# Altium PCB PCB_USB_Board.PcbDoc
Units mil, origin at the board's own origin, x right, y up, seen from the top; angles counter-clockwise.
Board outline 451 x 592 mil, 2 copper layers (Top Layer, Bottom Layer), stack 61.811 mil thick; 5 components, 4 nets, 40 pads, 3 vias.
Unrouted connection lines stored in the file: 17.
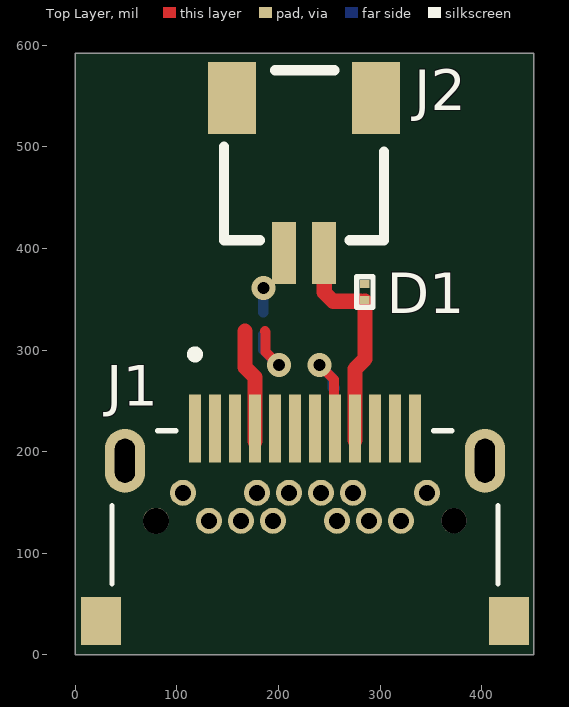
[diagram p0: Top Layer view]
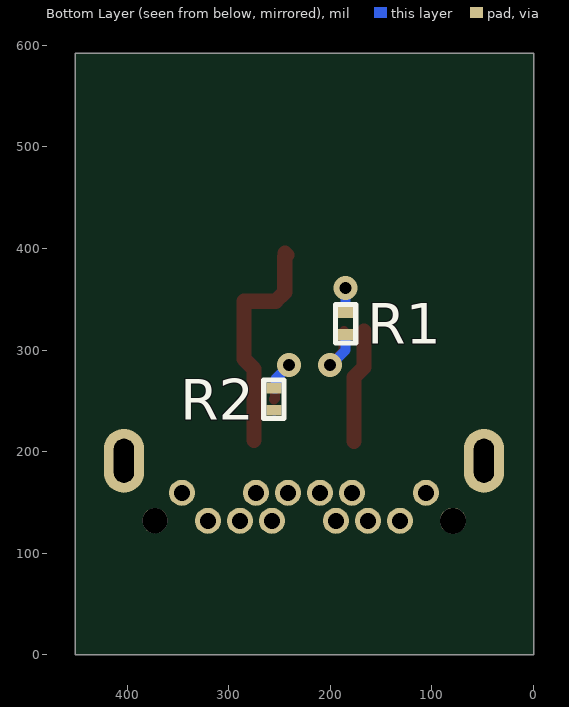
[diagram p1: Bottom Layer view, seen from below]
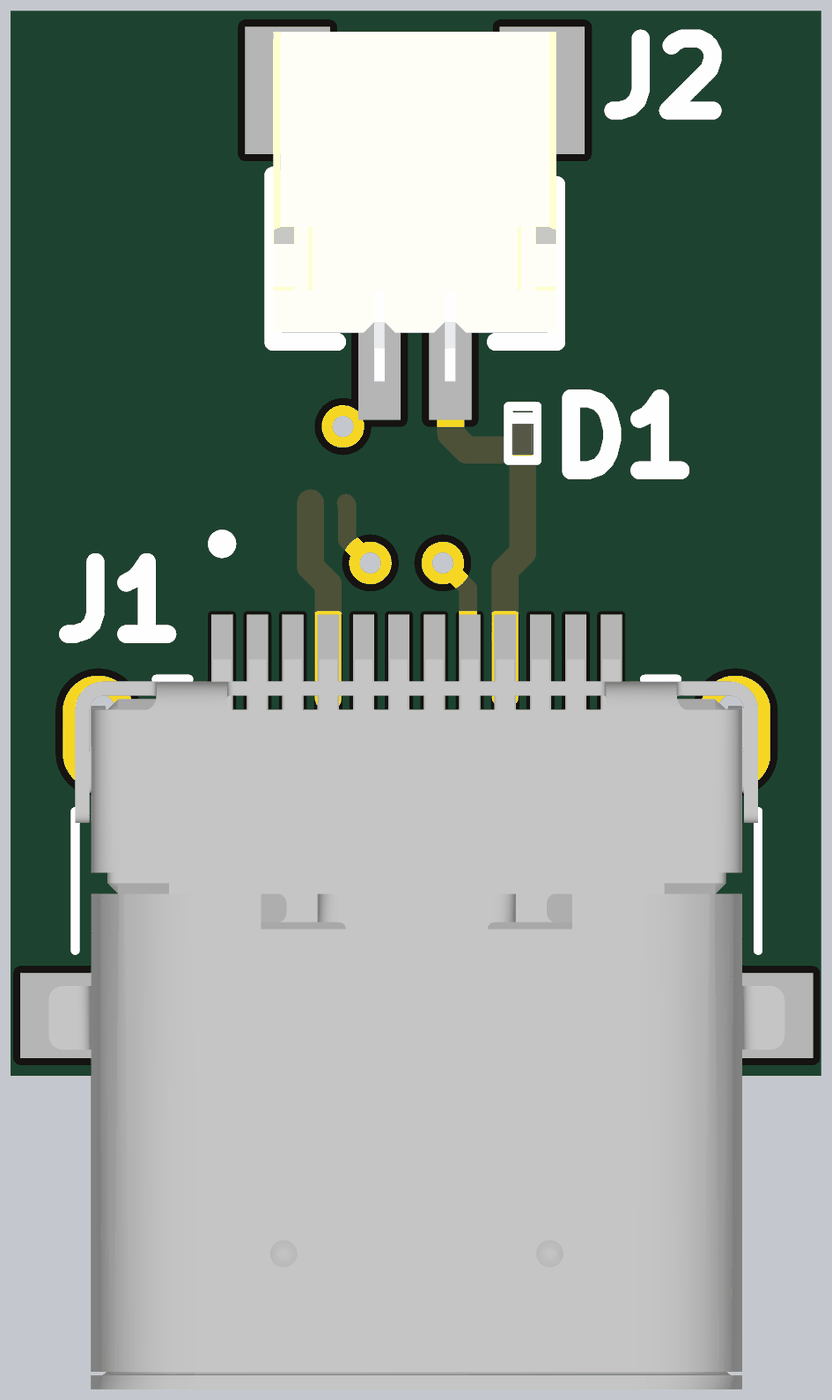
[diagram p2: 3D render of the assembled board from above, using the file's embedded part models]

## Layer stack, top to bottom
Top Solder: solder mask 0.3937, Solder Resist, Dk 3.5
Top Layer: signal copper 1.378
Dielectric 1: core 59.0551, FR-4, Dk 4.8
Bottom Layer: signal copper 1.378
Bottom Solder: solder mask 0.3937, Solder Resist, Dk 3.5

## Board outline
0,0 451,0 451,592 0,592

## Design rules (kind name [scope] priority, off if disabled: settings)
Clearance [All] p1: gap=7 ignorepadtopadclearanceinfootprint=FALSE except(5: Arc-SMDPad Track-SMDPad SMDPad-SMDPad)
HoleSize [All] p1: absolutevalues=TRUE maxlimit=1000 minlimit=1 maxpercent=80.000 minpercent=20.000
HoleToHoleClearance [All] p1: gap=2 allowstackedmicrovias=TRUE
MinimumSolderMaskSliver [All] p1: minsoldermaskwidth=2
PolygonConnect [All] p1: connectstyle=Relief reliefconductorwidth=10 reliefentries=4 polygonreliefangle="90 Angle" airgapwidth=10
RoutingVias [All] p1: holewidth=11.81 width=23.62 viastyle="Through Hole" minholewidth=11.81 minwidth=23.62 maxholewidth=11.81 maxwidth=23.62
SilkToSilkClearance [All] p1: silktosilkclearance=2
SilkToSolderMaskClearance [IsPad] p1: minsilkscreentomaskgap=2 clearancetoexposedcopper=TRUE
SolderMaskExpansion [All] p1: expansion=4 istentingtop=FALSE
Width [All] p1: maxlimit=100 minlimit=10 preferedwidth=12 minimp=50.000000 maximp=50.000000 favimp=50.000000
25 further rules are at their usual default settings.

## Components (designator, comment, footprint, x,y, rotation, side; value= is the part's Value field where it differs from the comment)
D1 "PESD5V0H1BSFYL" DSN0603-2 285,357.13 r270 top
J1 "UJ32-C-H-G-H2-SMT-TR" CUI_UJ32-C-H-G-H2-SMT-TR 226,4 r0 top locked
J2 "SM02B-SRSS-TB(LF)(SN)" SM02B-SRSS-TB(LF)(SN) 225,473 r180 top locked
R1 "5.1K" Res-0201 185,326 r270 bottom value=5.1kR
R2 "5.1K" Res-0201 255.53,251.53 r90 bottom value=5.1kR

## Footprints (in the part's own frame and the unit in brackets; to place one, negate y for a bottom-side part, rotate by r counter-clockwise, add the part's x,y. Pads: shape width x height; smd on the part's side, far side on the other; paste and mask are expansions set on the pad)
CUI_UJ32-C-H-G-H2-SMT-TR [mm]
  rect 0.3x1.7 smd mask+0.05: A1(-2.75,5.56) A2(-2.25,5.56) A3(-1.75,5.56) A4(-1.25,5.56) A5(-0.75,5.56) A6(-0.25,5.56) A7(0.25,5.56) A8(0.75,5.56) A9(1.25,5.56) A10(1.75,5.56) A11(2.25,5.56) A12(2.75,5.56)
  round 0.65 hole 0.4: B1(3.05,3.95) B2(2.4,3.25) B3(1.6,3.25) B4(1.2,3.95) B5(0.8,3.25) B6(0.4,3.95) B7(-0.4,3.95) B8(-0.8,3.25) B9(-1.2,3.95) B10(-1.6,3.25) B11(-2.4,3.25) B12(-3.05,3.95)
  rect 1x1.2 smd: SH1(-5.1,0.75) SH2(5.1,0.75)
  oval 1x1.6 hole 0.5 slot 1.1 at 90 deg: SH3(-4.5,4.75) SH4(4.5,4.75)
  round 0.65 hole 0.65 unplated: ""(-3.725,3.25)
  round 0.63 hole 0.63 unplated: ""(3.725,3.25)
  silkscreen extent -4.82,1.67 4.82,7.51, body extent -5.2,-4.53 5.2,5.78, height 3.52
DSN0603-2 [mm]
  rect 0.2x0.24 smd mask+0.055: 1(-0.2,0) 2(0.2,0)
  silkscreen extent -0.38,-0.2 0.38,0.2, body extent -0.3,-0.15 0.3,0.15, height 0.32
Res-0201 [mm]
  rect 0.27x0.37 smd mask+0.055: 1(-0.275,0) 2(0.275,0)
  silkscreen extent -0.48,-0.25 0.48,0.25, body extent -0.3,-0.15 0.3,0.15, height 0.29
SM02B-SRSS-TB(LF)(SN) [mm]
  rect 0.6x1.55 smd: 1(-0.5,1.975) 2(0.5,1.975)
  rect 1.2x1.8 smd: 3(-1.8,-1.9) 4(1.8,-1.9)
  silkscreen extent -2,-2.6 2,1.65, body extent -2,-2.73 2,2.22, height 2.91

## Part data
D1: "5V Clamp 7A (8/20µs) Ipp Tvs Diode Surface Mount DSN0603-2", Digikey Part Number=1727-2675-6-ND, Manufacturer="Nexperia USA Inc.", Package=0603, ComponentLink1Description="Digikey Link", ComponentLink1URL=https://www.digikey.com/en/products/detail/nexperia-usa-inc/PESD5V0H1BSFYL/5981341?s=N4IgTCBcDaIAoFEDKARArANQAwAkCMAQkgGICaAMiALoC%2BQA, Item Type="TVS Diode", Manufacturer Part Number=PESD5V0H1BSFYL
J1: "Type C, USB 3.2 Gen 2x2, 20 Gbps, 20 Vac, 5 A, Right Angle, Gold Flash, Surface Mount, Black Insulator, USB Receptacle", Package=None, Check_prices=https://www.snapeda.com/parts/UJ32-C-H-G-H2-SMT-TR/CUI+Devices/view-part/?ref=eda, CUI_purchase_URL=https://www.cuidevices.com/product/interconnect/connectors/usb-connectors/uj32-c-h-g-h2-smt-tr?utm_source=snapeda.com&utm_medium=referral&utm_campaign=snapedaBOM, Manfacturer="CUI Devices", Manfacturer Part Number=UJ32-C-H-G-H2-SMT-TR, SnapEDA_Link=https://www.snapeda.com/parts/UJ32-C-H-G-H2-SMT-TR/CUI+Devices/view-part/?ref=snap
J2: "Connector Header Surface Mount, Right Angle 2 position 0.039 _1.00mm_", Digikey Part Number=455-SM02B-SRSS-TBDKR-ND, Manufacturer="JST Sales", Manufacturer Part Number=SM02B-SRSS-TB_LF__SN_, Package=None, Availability=Unavailable, ComponentLink1Description="Digikey Link", ComponentLink1URL=https://www.digikey.com/en/products/detail/jst-sales-america-inc/SM02B-SRSS-TB/926708?s=N4IgTCBcDaIMoFkAMYBCBaOAlOd0BVUQBdAXyA, Price=None, SnapEDA_Link=https://www.snapeda.com/parts/SM02B-SRSS-TB%28LF%29%28SN%29/JST%20Sales%20America%20Inc./view-part/447499/?ref=snap
R1 R2: library part RC0201FR-075K1L, "RES 5.1K OHM 1% 1/20W 0201", Case Code (Imperial)=0201, Case Code (Metric)=0603, Digikey Part Number=YAG2741DKR-ND, LCSC Part Number=C274341, Manufacturer=Yageo, Max Operating Temperature=125°C, Max Power Dissipation=50mW, Min Operating Temperature=-55°C, Supplier Part Number=9072847, Temperature Coefficient=200ppm/°C, Tolerance=1%, Voltage Rating=25V, Case/Package=0201, Category="Chip SMD Resistors", ComponentLink1Description=http://www.mouser.com/ds/2/447/RC0201-559633.pdf?src-supplier=Mouser, ComponentLink1URL=http://www.mouser.com/ds/2/447/RC0201-559633.pdf?src-supplier=Mouser, ComponentLink2Description=https://datasheet.octopart.com/RC0201FR-075K1L-Yageo-datasheet-164759695.pdf?src-supplier=Future+Electronics, ComponentLink2URL=https://datasheet.octopart.com/RC0201FR-075K1L-Yageo-datasheet-164759695.pdf?src-supplier=Future+Electronics, ComponentLink3Description=http://www.yageo.com/documents/recent/PYu-RC_Group_51_RoHS_L_10.pdf?src-supplier=Digi-Key, ComponentLink3URL=http://www.yageo.com/documents/recent/PYu-RC_Group_51_RoHS_L_10.pdf?src-supplier=Digi-Key, Features="Moisture Resistant", Height=0.23mm, Item Type=Resistor, Lead Free="Lead Free", Length=0.6mm, Manufacturer Part Number=RC0201FR-075K1L, Number of Terminations=2, Packaging="Tape and Reel", Power Rating=50mW, Pricing="10000=0.0014, 40000=0.0013, 200000=0.0013, 400000=0.0012, 1250000=0.0011 (USD)", RoHS=Yes, RoHS Compliant=Yes, Series=RC, Stock=280000, Supplier="Future Electronics", Termination=SMD/SMT, Width=0.3mm

## Via types
v1: diameter 23.62, hole 11.81, Top Layer to Bottom Layer, 3 vias

## Nets (pads, with @x,y where several pads share a name; then routed paths per layer and width w, separated by ;. In a path a pad name is that pad's centre, name@x,y a point inside that pad or via, vN(x,y) a via of type N, cw(c..) or ccw(c..) an arc to the next point about the centre after c; other vN are vias at no path point)
GND: D1.1 J1.A1 J1.A12 J1.B1 J1.B12 J1.SH1 J1.SH2 J1.SH3 J1.SH4 J2.2 J2.3 J2.4 R1.1 R2.1 | length 24.6
  Bottom Layer w10: R1.1 v1(185,361) ; R2.1@255.21,240.39 R2.1
NetJ1_A5: J1.A5 R1.2 | length 75.6
  Top Layer w10: 186.63,318.46 187.22,317.86 187.22,298.15 v1(200.25,285.13)
  Bottom Layer w10: R1.2 185,300 199.87,285.13 v1(200.25,285.13)
NetJ1_B5: J1.B5 R2.2 | length 69.8
  Top Layer w10: v1(240.53,285.13) 254.62,271.03 254.62,252.43 255.53,251.53
  Bottom Layer w10: v1@240.53,285 253.24,272.28 253.24,262.67 253.56,262.35 R2.2
VBUS: D1.2 J1.A4 J1.A9 J1.B4 J1.B9 J2.1 | length 332.8
  Top Layer w15: 166.95,318.46 166.95,283.06 176.79,273.21 J1.A4@176.79,210.21 ; J2.1 243,393.56 245,391.56 245,356.79 253.79,348 D1.2@281,348 ; J1.A9@275.21,211.21 275.21,251.53 275.21,281.21 285.06,291.06 285.06,318.46 D1.2@285.06,348
pads on no net: J1. J1.A2 J1.A3 J1.A6 J1.A7 J1.A8 J1.A10 J1.A11 J1.B2 J1.B3 J1.B6 J1.B7 J1.B8 J1.B10 J1.B11

## Silkscreen, mask and mechanical layers (free items; w line width, h text height)
Board Shape:
  the board outline again, w10

## Dimensions
0,592 to 451,592 on Dimensions
0,0 to 0,592 on Dimensions

## Text inside footprints (layer, text, board x,y; h text height)
J1: Fabrication Info "PCB Edge" at 144.31,9.91 h24